# Altium PCB F407ZGT6.PcbDoc (part 2 of 7)
Units mil, origin at the board's own origin, x right, y up, seen from the top; angles counter-clockwise.
Board outline 4380 x 3940 mil, 2 copper layers (Top Layer, Bottom Layer); 88 components, 146 nets, 552 pads, 268 vias.
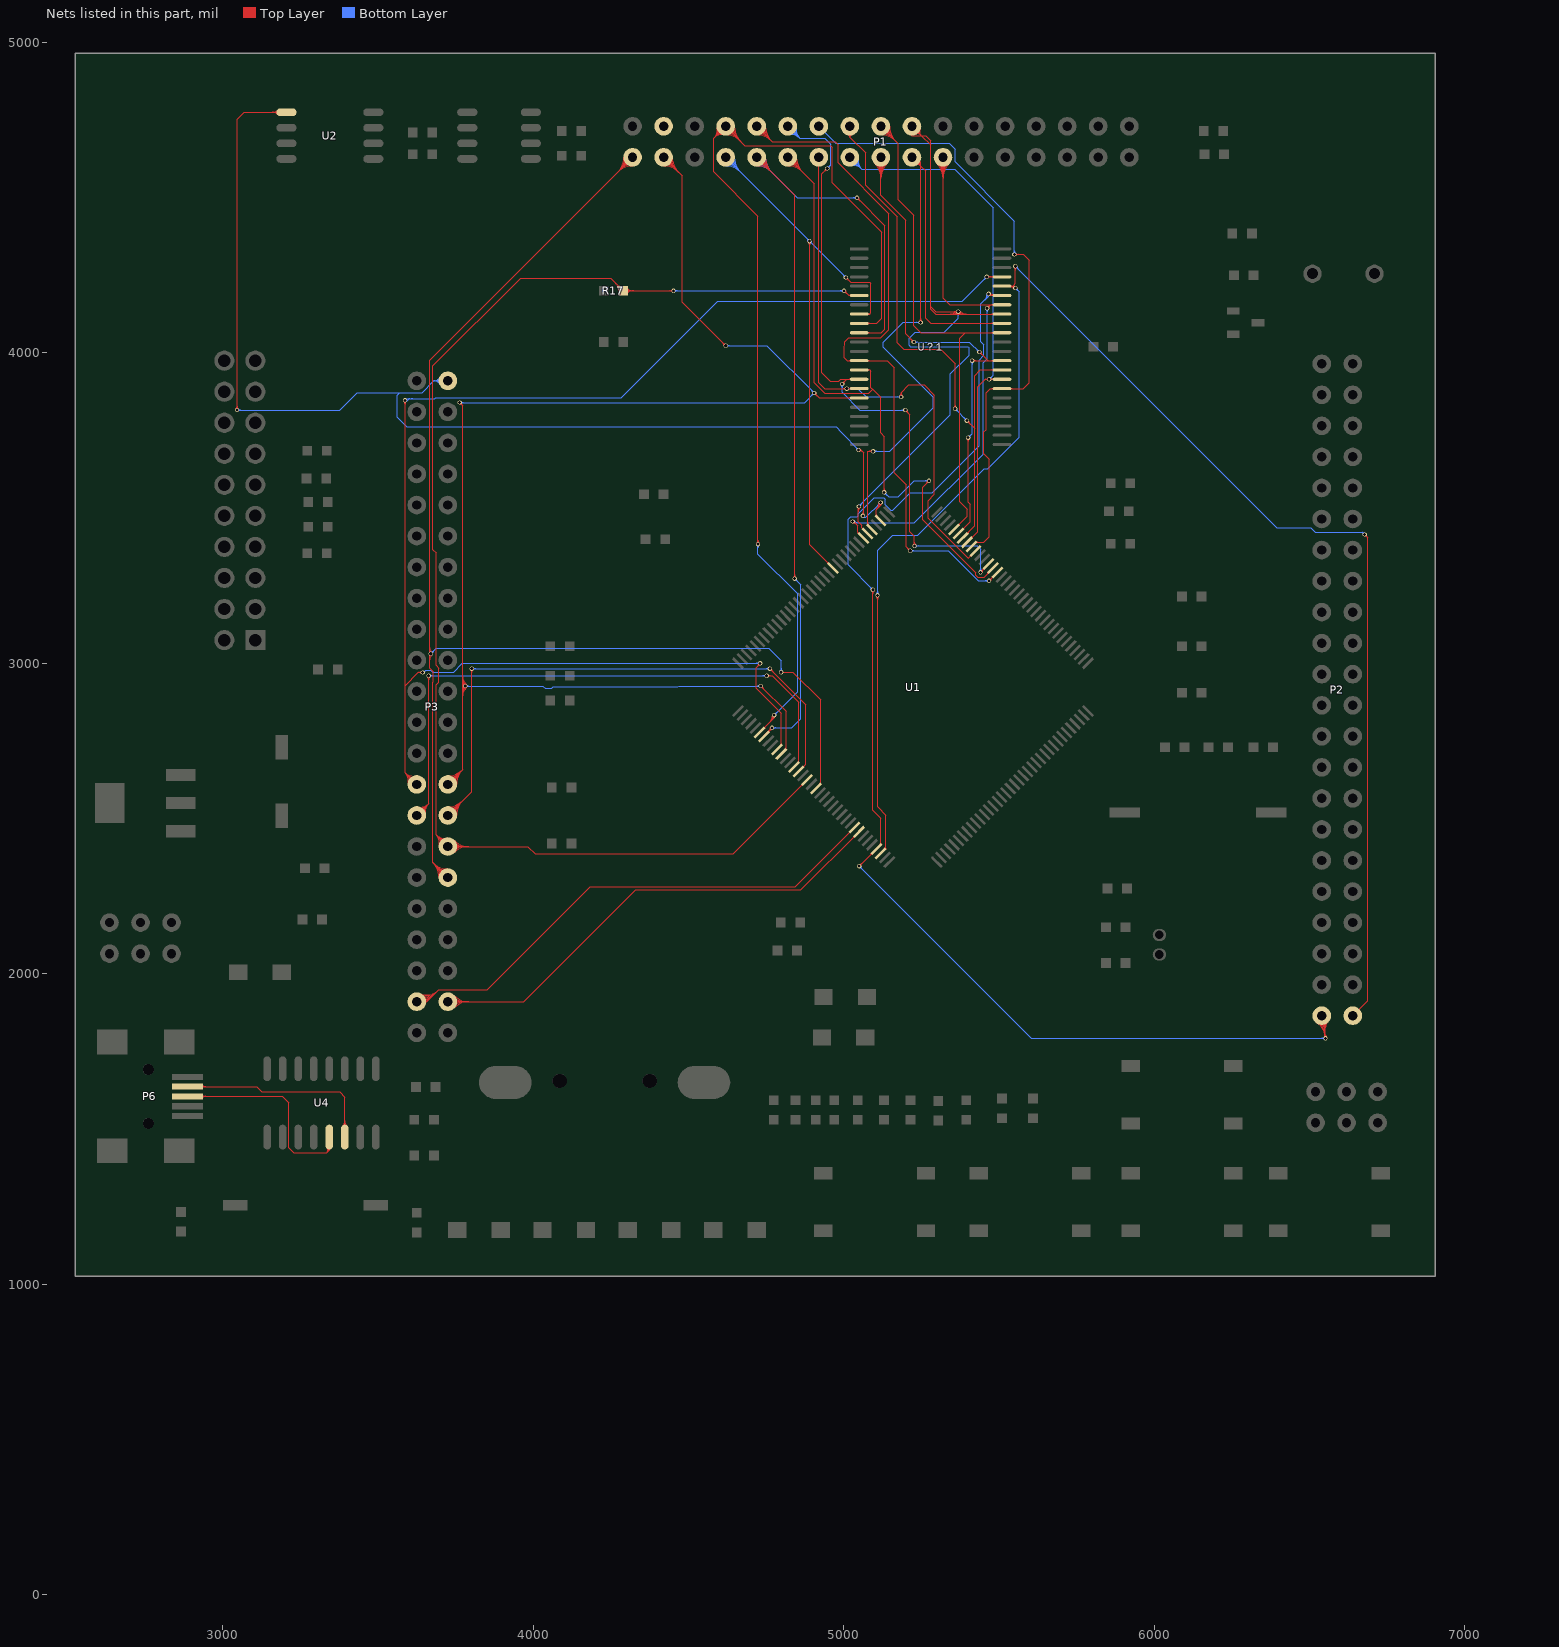
[diagram p2: the nets of this part, all layers, seen from the top]

## Via types
v1: diameter 14, hole 10, Top Layer to Bottom Layer, 265 vias
v2: diameter 150, hole 150, Top Layer to Bottom Layer, 3 vias

## Nets (pads, with @x,y where several pads share a name; then routed paths per layer and width w, separated by ;. In a path a pad name is that pad's centre, name@x,y a point inside that pad or via, vN(x,y) a via of type N, cw(c..) or ccw(c..) an arc to the next point about the centre after c; other vN are vias at no path point) (continued)
D1: P1.7 U1.86 U？1.8 | length 2304.5
  Top Layer w4: v1@4886.46,4356.46 cw(c4877.93,4347.93) 4890,4347.93 cw(c4902.07,4347.93) v1@4893.54,4356.46 ; v1(4890,4360) 4890,3382.45 U1.86@4965.93,3306.52 ; U1.86@4949.96,3320.16 ccw(c4944.34,3320.16) 4948.31,3324.14 ccw(c4952.29,3328.12) U1.86@4952.29,3322.49 ; v1@5007,4238 cw(c5007,4225.93) 5015.54,4234.46 cw(c5024.07,4243) v1@5012,4243 ; v1(5007,4243) 5022,4228 5084,4228 5088,4224 5088,4129 5084,4125 U？1.8@5050,4125 ; U？1.8@5077.12,4122.88 cw(c5082.24,4117.76) 5082.24,4125 cw(c5082.24,4132.24) U？1.8@5077.12,4127.12
  Bottom Layer w4: P1.7@4620,4602 cw(c4620,4534.4) 4667.8,4582.2 cw(c4715.6,4630) P1.7@4648,4630 ; P1.7@4620,4606 cw(c4620,4548.06) 4660.97,4589.03 cw(c4701.94,4630) P1.7@4644,4630 ; P1.7@4620,4610 cw(c4620,4561.72) 4654.14,4595.86 cw(c4688.28,4630) P1.7@4640,4630 ; P1.7@4620,4614 cw(c4620,4575.37) 4647.31,4602.69 cw(c4674.63,4630) P1.7@4636,4630 ; P1.7@4620,4630 v1(4890,4360) v1(5007,4243) ; v1@4885,4360 ccw(c4872.93,4360) 4881.46,4368.54 ccw(c4890,4377.07) v1@4890,4365 ; v1@4890,4355 cw(c4890,4342.93) 4898.54,4351.46 cw(c4907.07,4360) v1@4895,4360 ; v1@5002,4243 ccw(c4989.93,4243) 4998.46,4251.54 ccw(c5007,4260.07) v1@5007,4248
D2: P1.8 U1.114 U？1.9 | length 3902.5
  Top Layer w4: P1.8@4592.43,4725.12 cw(c4555.44,4718.57) 4582,4692 ; P1.8@4596.37,4725.81 cw(c4564.66,4720.2) 4587.43,4697.43 cw(c4610.2,4674.66) P1.8@4615.81,4706.37 ; P1.8@4600.31,4726.51 cw(c4573.88,4721.83) 4592.86,4702.86 cw(c4611.83,4683.88) P1.8@4616.51,4710.31 ; P1.8@4604.25,4727.21 cw(c4583.11,4723.47) 4598.29,4708.29 cw(c4613.47,4693.11) P1.8@4617.21,4714.25 ; P1.8@4615.12,4702.43 ccw(c4608.57,4665.44) 4582,4692 ; P1.8@4620,4702 cw(c4620,4634.4) 4667.8,4682.2 cw(c4715.6,4730) P1.8@4648,4730 ; P1.8@4620,4706 cw(c4620,4648.06) 4660.97,4689.03 cw(c4701.94,4730) P1.8@4644,4730 ; P1.8@4620,4710 cw(c4620,4661.72) 4654.14,4695.86 cw(c4688.28,4730) P1.8@4640,4730 ; P1.8@4620,4714 cw(c4620,4675.37) 4647.31,4702.69 cw(c4674.63,4730) P1.8@4636,4730 ; v1@4720.46,3387.54 ccw(c4711.93,3396.07) 4724,3396.07 ccw(c4736.07,3396.07) v1@4727.54,3387.54 ; v1(4724,3384) 4724,4441 4582,4583 4582,4692 ; U1.114@4729.3,2777.58 4776.07,2824.35 ; U1.114@4742.94,2793.55 ccw(c4742.94,2799.18) 4746.92,2795.2 ccw(c4750.9,2791.22) U1.114@4745.28,2791.22 ; 4761.37,2809.65 ccw(c4737.94,2833.07) v1@4771.07,2833.07 ; 4768.2,2816.48 ccw(c4751.6,2833.07) v1@4775.07,2833.07 ; v1@4773.55,2828.76 cw(c4770.97,2824.35) 4776.07,2824.35 ; 4775.03,2823.3 ccw(c4765.26,2833.07) v1@4779.07,2833.07 ; v1(4776.07,2833.07) 4776.07,2824.35 ; v1@4778.6,2828.76 ccw(c4781.18,2824.35) 4776.07,2824.35 ; U？1.9@5050,4095 5106,4095 5123,4112 5123,4389 4964,4548 4964,4662 4958,4668 4682,4668 P1.8@4620,4730 4582,4692 ; U？1.9@5077.12,4092.88 cw(c5082.24,4087.76) 5082.24,4095 cw(c5082.24,4102.24) U？1.9@5077.12,4097.12
  Bottom Layer w4: v1@4720.46,3380.46 cw(c4711.93,3371.93) 4724,3371.93 cw(c4736.07,3371.93) v1@4727.54,3380.46 ; v1(4724,3384) 4724,3351.58 4852,3223.58 4852,2909 v1(4776.07,2833.07) ; v1@4776.07,2838.07 ccw(c4776.07,2850.14) 4784.61,2841.61 ccw(c4793.14,2833.07) v1@4781.07,2833.07
D3: P1.9 U1.115 U？1.10 | length 3766.2
  Top Layer w4: P1.9@4720,4602 cw(c4720,4534.4) 4767.8,4582.2 cw(c4815.6,4630) P1.9@4748,4630 ; P1.9@4720,4606 cw(c4720,4548.06) 4760.97,4589.03 cw(c4801.94,4630) P1.9@4744,4630 ; P1.9@4720,4610 cw(c4720,4561.72) 4754.14,4595.86 cw(c4788.28,4630) P1.9@4740,4630 ; P1.9@4720,4614 cw(c4720,4575.37) 4747.31,4602.69 cw(c4774.63,4630) P1.9@4736,4630 ; P1.9@4720,4630 4842,4508 v1(4842,3273) ; U1.115@4743.22,2763.66 4743.22,2766.22 v1(4769,2792) ; U1.115@4758.93,2779.2 cw(c4773.14,2771) v1@4769.97,2787.09 ; U1.115@4759.2,2777.3 cw(c4771.01,2777.3) 4762.66,2785.66 ; 4761.99,2784.49 cw(c4766.75,2781.74) v1@4767.93,2787.12 ; 4763.33,2786.83 cw(c4770.88,2782.47) v1@4769.19,2791.02 ; v1@4764,2792 cw(c4751.93,2792) 4760.46,2783.46 cw(c4769,2774.93) v1@4769,2787 ; v1@4838.46,3276.54 ccw(c4829.93,3285.07) 4842,3285.07 ccw(c4854.07,3285.07) v1@4845.54,3276.54 ; v1@5043,4494.38 cw(c5043,4482.31) 5051.54,4490.85 cw(c5060.07,4499.38) v1@5048,4499.38 ; v1(5043,4499.38) 5133,4409.38 5133,4077 5121,4065 U？1.10@5050,4065 ; U？1.10@5077.12,4062.88 cw(c5082.24,4057.76) 5082.24,4065 cw(c5082.24,4072.24) U？1.10@5077.12,4067.12
  Bottom Layer w4: P1.9@4720,4602 cw(c4720,4534.4) 4767.8,4582.2 cw(c4815.6,4630) P1.9@4748,4630 ; P1.9@4720,4606 cw(c4720,4548.06) 4760.97,4589.03 cw(c4801.94,4630) P1.9@4744,4630 ; P1.9@4720,4610 cw(c4720,4561.72) 4754.14,4595.86 cw(c4788.28,4630) P1.9@4740,4630 ; P1.9@4720,4614 cw(c4720,4575.37) 4747.31,4602.69 cw(c4774.63,4630) P1.9@4736,4630 ; P1.9@4720,4630 4850.62,4499.38 v1(5043,4499.38) ; v1(4769,2792) 4832,2792 4862,2822 4862,3253 v1(4842,3273) ; v1@4772.54,2788.46 cw(c4781.07,2779.93) 4781.07,2792 cw(c4781.07,2804.07) v1@4772.54,2795.54 ; v1@4842,3268 cw(c4842,3255.93) 4850.54,3264.46 cw(c4859.07,3273) v1@4847,3273 ; v1@5039.46,4495.85 ccw(c5030.93,4487.31) 5030.93,4499.38 ccw(c5030.93,4511.45) v1@5039.46,4502.92
D4: P1.10 U1.58 U？1.13 | length 2718.7
  Top Layer w4: P1.10@4720,4702 cw(c4720,4634.4) 4767.8,4682.2 cw(c4815.6,4730) P1.10@4748,4730 ; P1.10@4720,4706 cw(c4720,4648.06) 4760.97,4689.03 cw(c4801.94,4730) P1.10@4744,4730 ; P1.10@4720,4710 cw(c4720,4661.72) 4754.14,4695.86 cw(c4788.28,4730) P1.10@4740,4730 ; P1.10@4720,4714 cw(c4720,4675.37) 4747.31,4702.69 cw(c4774.63,4730) P1.10@4736,4730 ; P1.10@4720,4730 4770,4680 4972.7,4680 4982,4670.7 4982,4612.47 5145.81,4448.66 5145.81,4074.9 5120,4049.08 5017.08,4049.08 5004,4036 5004,4024 5002,4022 5002,3984 5011,3975 U？1.13@5050,3975 5140,3975 5163,3952 5163,3614 5201,3576 5201,3376 v1(5214.46,3362.54) ; U？1.13@5022.88,3972.88 ccw(c5017.76,3967.76) 5017.76,3975 ccw(c5017.76,3982.24) U？1.13@5022.88,3977.12 ; U？1.13@5077.12,3972.88 cw(c5082.24,3967.76) 5082.24,3975 cw(c5082.24,3982.24) U？1.13@5077.12,3977.12 ; v1@5209.46,3362.54 ccw(c5197.39,3362.54) 5205.93,3371.07 ccw(c5214.46,3379.61) v1@5214.46,3367.54 ; v1(5468.14,3265.86) U1.58@5494.87,3292.6 ; v1@5468.14,3270.86 ccw(c5468.14,3282.94) 5476.67,3274.4 ccw(c5485.21,3265.86) v1@5473.14,3265.86 ; U1.58@5478.9,3278.96 cw(c5473.27,3278.96) 5477.25,3274.98 cw(c5481.23,3271) U1.58@5481.23,3276.63
  Bottom Layer w4: v1(5214.46,3362.54) 5337.5,3362.54 5434.17,3265.86 v1(5468.14,3265.86) ; v1@5218,3359 cw(c5226.53,3350.47) 5226.53,3362.54 cw(c5226.53,3374.61) v1@5218,3366.07 ; v1@5464.6,3262.33 ccw(c5456.06,3253.79) 5456.06,3265.86 ccw(c5456.06,3277.94) v1@5464.6,3269.4
D5: P1.11 U1.59 U？1.14 | length 2474.6
  Top Layer w4: P1.11@4820,4602 cw(c4820,4534.4) 4867.8,4582.2 cw(c4915.6,4630) P1.11@4848,4630 ; P1.11@4820,4606 cw(c4820,4548.06) 4860.97,4589.03 cw(c4901.94,4630) P1.11@4844,4630 ; P1.11@4820,4610 cw(c4820,4561.72) 4854.14,4595.86 cw(c4888.28,4630) P1.11@4840,4630 ; P1.11@4820,4614 cw(c4820,4575.37) 4847.31,4602.69 cw(c4874.63,4630) P1.11@4836,4630 ; P1.11@4820,4630 4905,4545 4905,3904 4939,3870 5080,3870 5093,3883 ; U？1.14@5050,3945 5084,3945 5088,3941 5088,3888 5093,3883 ; U？1.14@5077.12,3942.88 cw(c5082.24,3937.76) 5082.24,3945 cw(c5082.24,3952.24) U？1.14@5077.12,3947.12 ; v1@5126.96,3554.15 ccw(c5118.43,3562.68) 5130.5,3562.68 ccw(c5142.57,3562.68) v1@5134.04,3554.15 ; v1(5130.5,3550.61) 5130.5,3730.61 5119,3742.11 5119,3857 5093,3883 ; v1@5270,3588 cw(c5257.93,3588) 5266.46,3579.46 cw(c5275,3570.93) v1@5275,3583 ; v1@5279,3588 v1(5275,3588) 5255,3568 5255,3463 5426,3292 5426,3284 5432,3278 5452.43,3278 U1.59@5480.95,3306.52 ; U1.59@5464.98,3292.88 cw(c5459.35,3292.88) 5463.33,3288.9 cw(c5467.31,3284.92) U1.59@5467.31,3290.55
  Bottom Layer w4: v1@5130.5,3545.61 cw(c5130.5,3533.54) 5139.04,3542.07 cw(c5147.57,3550.61) v1@5135.5,3550.61 ; v1(5130.5,3550.61) 5145.11,3536 5175.11,3536 5227.11,3588 v1(5275,3588) ; v1@5271.46,3584.46 ccw(c5262.93,3575.93) 5262.93,3588 ccw(c5262.93,3600.07) v1@5271.46,3591.54
D6: P1.12 U1.60 U？1.15 | length 2547.1
  Top Layer w4: v1@4942,4594 cw(c4929.93,4594) 4938.46,4585.46 cw(c4947,4576.93) v1@4947,4589 ; v1(4947,4594) 4930,4577 4930,3936 4957,3909 4984,3909 4990,3915 5010,3915 ; v1(4995,3900) 5010,3915 ; v1@4995,3905 ccw(c4995,3917.07) 5003.54,3908.54 ccw(c5012.07,3900) v1@5000,3900 ; U？1.15@5022.88,3912.88 ccw(c5017.76,3907.76) 5017.76,3915 ccw(c5017.76,3922.24) U？1.15@5022.88,3917.12 ; U？1.15@5050,3915 5010,3915 ; v1@5198.56,3811 cw(c5198.56,3798.93) 5207.09,3807.46 cw(c5215.63,3816) v1@5203.56,3816 ; v1(5198.56,3816) 5213,3801.56 5213,3423.88 5228,3408.88 v1(5228,3378) ; v1@5224.46,3381.54 ccw(c5215.93,3390.07) 5228,3390.07 ccw(c5240.07,3390.07) v1@5231.54,3381.54 ; v1(5441,3293) 5441,3294.41 U1.60@5467.03,3320.44 ; v1@5441,3298 ccw(c5441,3306.68) 5447.14,3300.54 ; v1@5446,3293 cw(c5461.47,3293) U1.60@5450.53,3303.94 ; U1.60@5451.06,3306.8 cw(c5445.43,3306.8) 5449.41,3302.82 cw(c5453.39,3298.84) U1.60@5453.39,3304.47
  Bottom Layer w4: P1.12@4820,4730 4859,4691 ; P1.12@4822.46,4714.19 cw(c4825.99,4691.43) 4842.28,4707.72 cw(c4858.57,4724.01) P1.12@4835.81,4727.54 ; P1.12@4823.07,4710.24 cw(c4827.49,4681.78) 4847.86,4702.14 cw(c4868.22,4722.51) P1.12@4839.76,4726.93 ; P1.12@4823.69,4706.28 cw(c4828.99,4672.14) 4853.43,4696.57 cw(c4877.86,4721.01) P1.12@4843.72,4726.31 ; P1.12@4824.3,4702.33 cw(c4830.49,4662.49) 4859,4691 ; P1.12@4847.67,4725.7 ccw(c4887.51,4719.51) 4859,4691 ; v1(4947,4594) 4958,4605 4958,4672 4939,4691 4859,4691 ; v1@4947,4599 ccw(c4947,4611.07) 4955.54,4602.54 ccw(c4964.07,4594) v1@4952,4594 ; v1@4991.46,3896.46 cw(c4982.93,3887.93) 4995,3887.93 cw(c5007.07,3887.93) v1@4998.54,3896.46 ; v1(4995,3900) 4995,3873.15 5052.15,3816 v1(5198.56,3816) ; v1@5195.02,3812.46 ccw(c5186.49,3803.93) 5186.49,3816 ccw(c5186.49,3828.07) v1@5195.02,3819.54 ; v1(5228,3378) 5431,3378 5441,3368 v1(5441,3293) ; v1@5231.54,3374.46 cw(c5240.07,3365.93) 5240.07,3378 cw(c5240.07,3390.07) v1@5231.54,3381.54 ; v1@5437.46,3296.54 ccw(c5428.93,3305.07) 5441,3305.07 ccw(c5453.07,3305.07) v1@5444.54,3296.54
D7: P1.13 U1.63 U？1.16 | length 1931.1
  Top Layer w4: P1.13@4920,4630 4920,3904 4939,3885 v1(5010,3885) U？1.16@5050,3885 ; v1@5006.46,3881.46 ccw(c4997.93,3872.93) 4997.93,3885 ccw(c4997.93,3897.07) v1@5006.46,3888.54 ; v1@5013.54,3881.46 cw(c5022.07,3872.93) 5022.07,3885 cw(c5022.07,3897.07) v1@5013.54,3888.54 ; U？1.16@5022.88,3882.88 ccw(c5017.76,3877.76) 5017.76,3885 ccw(c5017.76,3892.24) U？1.16@5022.88,3887.12 ; v1@5181.46,3861.54 ccw(c5172.93,3870.07) 5185,3870.07 ccw(c5197.07,3870.07) v1@5188.54,3861.54 ; v1(5185,3858) 5185,3872 5210,3897 5259,3897 5292,3864 5292,3544 5272,3524 5272,3468 5401.54,3338.46 U1.63@5425.27,3362.2 ; U1.63@5409.3,3348.55 cw(c5403.68,3348.55) 5407.65,3344.58 cw(c5411.63,3340.6) U1.63@5411.63,3346.22
  Bottom Layer w4: v1(5010,3885) 5045,3885 5072,3858 v1(5185,3858) ; v1@5013.54,3881.46 cw(c5022.07,3872.93) 5022.07,3885 cw(c5022.07,3897.07) v1@5013.54,3888.54 ; v1@5181.46,3854.46 ccw(c5172.93,3845.93) 5172.93,3858 ccw(c5172.93,3870.07) v1@5181.46,3861.54
D8: P1.14 U1.64 U？1.29 | length 2103
  Top Layer w4: U1.64@5411.36,3376.12 5425.24,3390 5451.17,3390 5469.17,3408 5469.17,3657.83 5452,3675 5452,3746 5459,3753 5459,3872 5472,3885 U？1.29@5510,3885 5578,3885 5597,3904 5597,4299 5579,4317 v1(5550,4317) ; U1.64@5426.65,3388.11 cw(c5431.21,3383.54) 5431.21,3390 ; U1.64@5426.65,3391.41 ccw(c5430.04,3394.8) U1.64@5430.04,3390 ; U？1.29@5482.88,3882.88 ccw(c5477.76,3877.76) 5477.76,3885 ccw(c5477.76,3892.24) U？1.29@5482.88,3887.12 ; U？1.29@5537.12,3882.88 cw(c5542.24,3877.76) 5542.24,3885 cw(c5542.24,3892.24) U？1.29@5537.12,3887.12 ; v1@5553.54,4313.46 cw(c5562.07,4304.93) 5562.07,4317 cw(c5562.07,4329.07) v1@5553.54,4320.54
  Bottom Layer w4: P1.14@4920,4730 4975,4675 5340,4675 5359,4656 5359,4615 5550,4424 v1(5550,4317) ; v1@5546.46,4320.54 ccw(c5537.93,4329.07) 5550,4329.07 ccw(c5562.07,4329.07) v1@5553.54,4320.54
D9: P1.15 U1.65 U？1.30 | length 1994.9
  Top Layer w4: U1.65@5397.44,3390.04 5432,3424.6 5432,3891 5456,3915 v1(5468.42,3915) U？1.30@5510,3915 ; U1.65@5411.08,3406.01 ccw(c5411.08,3411.63) 5415.06,3407.66 ccw(c5419.03,3403.68) U1.65@5413.41,3403.68 ; v1@5464.88,3911.46 ccw(c5456.34,3902.93) 5456.34,3915 ccw(c5456.34,3927.07) v1@5464.88,3918.54 ; v1@5471.95,3911.46 cw(c5480.49,3902.93) 5480.49,3915 cw(c5480.49,3927.07) v1@5471.95,3918.54 ; U？1.30@5482.88,3912.88 ccw(c5477.76,3907.76) 5477.76,3915 ccw(c5477.76,3922.24) U？1.30@5482.88,3917.12
  Bottom Layer w4: P1.15@5020,4630 5058,4592 ; P1.15@5022.79,4614.25 cw(c5026.53,4593.11) 5041.71,4608.29 cw(c5056.89,4623.47) P1.15@5035.75,4627.21 ; P1.15@5023.49,4610.31 cw(c5028.17,4583.88) 5047.14,4602.86 cw(c5066.12,4621.83) P1.15@5039.69,4626.51 ; P1.15@5024.19,4606.37 cw(c5029.8,4574.66) 5052.57,4597.43 cw(c5075.34,4620.2) P1.15@5043.63,4625.81 ; P1.15@5024.88,4602.43 cw(c5031.43,4565.44) 5058,4592 ; P1.15@5047.57,4625.12 ccw(c5084.56,4618.57) 5058,4592 ; v1(5468.42,3915) 5482,3928.58 5482,4468 5358,4592 5058,4592 ; v1@5468.42,3920 ccw(c5468.42,3932.07) 5476.95,3923.54 ccw(c5485.49,3915) v1@5473.42,3915
D10: P1.16 U1.66 U？1.31 | length 1961
  Top Layer w4: P1.16@5013.85,4702.68 cw(c5012.13,4695) 5020,4695 ; P1.16@5020,4730 5020,4695 ; P1.16@5026.15,4702.68 ccw(c5027.87,4695) 5020,4695 ; v1@5355.46,3823.54 ccw(c5346.93,3832.07) 5359,3832.07 ccw(c5371.07,3832.07) v1@5362.54,3823.54 ; v1(5359,3820) 5359,3965 5312,4012 5193,4012 5173,4032 5173,4438 5071,4540 5071,4644 5020,4695 ; U1.66@5383.52,3403.96 5422,3442.44 5422,3757 ; v1@5397,3777 cw(c5397,3764.93) 5405.54,3773.46 cw(c5414.07,3782) v1@5402,3782 ; v1(5397,3782) 5422,3757 ; U1.66@5397.16,3419.93 ccw(c5397.16,3425.55) 5401.14,3421.58 ccw(c5405.11,3417.6) U1.66@5399.49,3417.6 ; U？1.31@5482.88,3942.88 ccw(c5477.76,3937.76) 5477.76,3945 ccw(c5477.76,3952.24) U？1.31@5482.88,3947.12 ; U？1.31@5510,3945 5440,3945 5422,3927 5422,3757
  Bottom Layer w4: v1@5359,3815 cw(c5359,3802.93) 5367.54,3811.46 cw(c5376.07,3820) v1@5364,3820 ; v1(5359,3820) v1(5397,3782) ; v1@5392,3782 ccw(c5379.93,3782) 5388.46,3790.54 ccw(c5397,3799.07) v1@5397,3787
D11: P1.17 U1.67 U？1.32 | length 2085.9
  Top Layer w4: P1.17@5100.2,4610.2 cw(c5052.4,4562.4) 5120,4562.4 cw(c5187.6,4562.4) P1.17@5139.8,4610.2 ; P1.17@5103.03,4613.03 cw(c5062.06,4572.06) 5120,4572.06 cw(c5177.94,4572.06) P1.17@5136.97,4613.03 ; P1.17@5105.86,4615.86 cw(c5071.72,4581.72) 5120,4581.72 cw(c5168.28,4581.72) P1.17@5134.14,4615.86 ; P1.17@5108.69,4618.69 cw(c5081.37,4591.37) 5120,4591.37 cw(c5158.63,4591.37) P1.17@5131.31,4618.69 ; P1.17@5120,4630 5120,4507.74 5200,4427.74 5200,4061 v1(5226,4035) ; v1@5221,4035 ccw(c5208.93,4035) 5217.46,4043.54 ccw(c5226,4052.07) v1@5226,4040 ; U1.67@5369.6,3417.87 5408.19,3456.47 5408.19,3512.19 5401,3519.39 v1(5401,3727) ; U1.67@5383.24,3433.85 ccw(c5383.24,3439.47) 5387.22,3435.49 ccw(c5391.2,3431.51) U1.67@5385.57,3431.51 ; v1@5397.46,3723.46 cw(c5388.93,3714.93) 5401,3714.93 cw(c5413.07,3714.93) v1@5404.54,3723.46 ; v1(5414,3975) 5465,3975 ; v1@5417.54,3971.46 cw(c5426.07,3962.93) 5426.07,3975 cw(c5426.07,3987.07) v1@5417.54,3978.54 ; v1@5437,3998 cw(c5437,3985.93) 5445.54,3994.46 cw(c5454.07,4003) v1@5442,4003 ; v1(5437,4003) 5465,3975 ; U？1.32@5482.88,3972.88 ccw(c5477.76,3967.76) 5477.76,3975 ccw(c5477.76,3982.24) U？1.32@5482.88,3977.12 ; U？1.32@5510,3975 5465,3975
  Bottom Layer w4: v1(5226,4035) 5405,4035 v1(5437,4003) ; v1@5229.54,4031.46 cw(c5238.07,4022.93) 5238.07,4035 cw(c5238.07,4047.07) v1@5229.54,4038.54 ; v1(5401,3727) 5414,3740 v1(5414,3975) ; v1@5401,3732 ccw(c5401,3744.07) 5409.54,3735.54 ccw(c5418.07,3727) v1@5406,3727 ; v1@5410.46,3971.46 cw(c5401.93,3962.93) 5414,3962.93 cw(c5426.07,3962.93) v1@5417.54,3971.46 ; v1@5432,4003 ccw(c5419.93,4003) 5428.46,4011.54 ccw(c5437,4020.07) v1@5437,4008
D12: P1.18 U1.68 U？1.35 | length 2001.8
  Top Layer w4: P1.18@5120,4702 cw(c5120,4634.4) 5167.8,4682.2 cw(c5215.6,4730) P1.18@5148,4730 ; P1.18@5120,4706 cw(c5120,4648.06) 5160.97,4689.03 cw(c5201.94,4730) P1.18@5144,4730 ; P1.18@5120,4710 cw(c5120,4661.72) 5154.14,4695.86 cw(c5188.28,4730) P1.18@5140,4730 ; P1.18@5120,4714 cw(c5120,4675.37) 5147.31,4702.69 cw(c5174.63,4730) P1.18@5136,4730 ; P1.18@5120,4730 5176,4674 5176,4493.01 5226,4443.01 5226,4087 5248,4065 5391,4065 ; U1.68@5355.68,3431.79 5398.19,3474.31 5398.19,3496 5374,3520.19 5374,4048 5391,4065 ; U1.68@5369.32,3447.77 ccw(c5369.32,3453.39) 5373.3,3449.41 ccw(c5377.28,3445.43) U1.68@5371.65,3445.43 ; U？1.35@5482.88,4062.88 ccw(c5477.76,4057.76) 5477.76,4065 ccw(c5477.76,4072.24) U？1.35@5482.88,4067.12 ; U？1.35@5510,4065 5391,4065
D13: P1.19 U1.77 U？1.36 | length 2457.7
  Top Layer w4: 5077,3452.43 ccw(c5084.56,3452.43) U1.77@5079.22,3447.08 ; U1.77@5091.21,3431.79 5077,3446 5077,3683 v1(5095,3683) ; v1@5091.46,3679.46 ccw(c5082.93,3670.93) 5082.93,3683 ccw(c5082.93,3695.07) v1@5091.46,3686.54 ; P1.19@5230.34,4608.34 cw(c5235.52,4597.52) 5244,4606 cw(c5252.48,4614.48) P1.19@5241.66,4619.66 ; P1.19@5232.07,4604.73 cw(c5238.1,4592.1) 5248,4602 ; v1@5244.46,4101.54 ccw(c5235.93,4110.07) 5248,4110.07 ccw(c5260.07,4110.07) v1@5251.54,4101.54 ; P1.19@5245.27,4617.93 ccw(c5257.9,4611.9) 5248,4602 ; v1(5248,4098) 5248,4602 ; U？1.36@5482.88,4092.88 ccw(c5477.76,4087.76) 5477.76,4095 ccw(c5477.76,4102.24) U？1.36@5482.88,4097.12 ; U？1.36@5510,4095 5280,4095 5264,4111 5264,4586 5248,4602 ; P1.19@5234,4616 5220,4616 P1.19@5220,4630 P1.19@5234,4616 ; P1.19@5234,4616 5248,4616 5248,4602 ; P1.19@5234,4616 5248,4602
  Bottom Layer w4: v1(5095,3683) 5148,3683 5289,3824 5289,3857 5128,4018 5128,4034 5192,4098 v1(5248,4098) ; v1@5098.54,3679.46 cw(c5107.07,3670.93) 5107.07,3683 cw(c5107.07,3695.07) v1@5098.54,3686.54 ; v1@5244.46,4094.46 ccw(c5235.93,4085.93) 5235.93,4098 ccw(c5235.93,4110.07) v1@5244.46,4101.54
D14: P1.20 U1.78 U？1.37 | length 2609.7
  Top Layer w4: v1@5045.46,3501.78 cw(c5041.76,3498.08) 5047,3498.08 cw(c5056.24,3498.08) v1@5049.71,3504.61 ; 5047,3488.42 cw(c5065.9,3488.42) v1@5052.54,3501.78 ; v1(5049,3505.32) 5047,3503.32 5047,3456.14 5058,3445.14 5058,3437.36 5077.29,3418.07 U1.78@5077.29,3417.87 ; 5059.53,3435.82 cw(c5055.23,3431.51) U1.78@5061.32,3431.51 ; 5060,3435.36 ccw(c5063.65,3439.01) U1.78@5063.65,3433.85 ; P1.20@5227.44,4711.44 cw(c5232.27,4699.41) 5241.43,4708.57 cw(c5250.59,4717.73) P1.20@5238.56,4722.56 ; P1.20@5228.93,4707.72 cw(c5234.72,4693.29) 5245.71,4704.29 cw(c5256.71,4715.28) P1.20@5242.28,4721.07 ; P1.20@5230.42,4704.01 cw(c5237.17,4687.17) 5250,4700 ; P1.20@5245.99,4719.58 ccw(c5262.83,4712.83) 5250,4700 ; 5337.62,4125 ccw(c5337.62,4164.38) 5365.46,4136.54 cw(c5356.93,4145.07) 5356.93,4133 cw(c5356.93,4120.93) v1@5365.46,4129.46 ; 5347.27,4125 ccw(c5347.27,4154.73) v1@5368.29,4133.71 ; 5356.93,4125 ccw(c5356.93,4145.07) v1@5371.12,4130.88 ; 5364.05,4128.05 ccw(c5371.41,4135.41) 5371.41,4125 ; 5366.59,4125 ccw(c5366.59,4135.41) 5373.95,4128.05 ; v1@5366.88,4130.88 ccw(c5381.07,4145.07) 5381.07,4125 ; v1(5369,4133) 5296,4133 5280,4149 ; v1@5369.71,4133.71 ccw(c5390.73,4154.73) 5390.73,4125 ; v1@5372.54,4136.54 ccw(c5400.38,4164.38) 5400.38,4125 ; U？1.37@5482.88,4122.88 ccw(c5477.76,4117.76) 5477.76,4125 ccw(c5477.76,4132.24) U？1.37@5482.88,4127.12 ; U？1.37@5510,4125 5296,4125 5280,4141 5280,4149 ; 5250,4700 5220,4700 P1.20@5220,4730 5250,4700 ; 5250,4700 5264,4700 5280,4684 5280,4670 ; 5250,4700 5280,4670 ; 5280,4149 5280,4670
  Bottom Layer w4: v1(5049,3505.32) 5344,3800.32 5344,3933 5404,3993 5404,4016 5400,4020 5215,4020 5211,4024 5211,4048 5230,4067 5324,4067 5369,4112 v1(5369,4133) ; v1@5049,3510.32 ccw(c5049,3522.39) 5057.54,3513.86 ccw(c5066.07,3505.32) v1@5054,3505.32 ; v1@5365.46,4129.46 cw(c5356.93,4120.93) 5369,4120.93 cw(c5381.07,4120.93) v1@5372.54,4129.46
D15: P1.21 U1.79 U？1.38 | length 2179.4
  Top Layer w4: v1@5029,3452 cw(c5029,3432.69) 5042.66,3446.34 ; v1@5029,3456 cw(c5029,3446.34) 5035.83,3453.17 ; v1(5029,3457) 5032,3457 5045,3444 5045,3422.33 U1.79@5063.37,3403.96 ; v1@5034,3457 ccw(c5038.83,3457) 5035.41,3453.59 ; U1.79@5047.4,3417.6 ccw(c5041.77,3417.6) 5045.75,3421.58 ccw(c5049.73,3425.55) U1.79@5049.73,3419.93 ; P1.21@5300.2,4610.2 cw(c5252.4,4562.4) 5320,4562.4 cw(c5387.6,4562.4) P1.21@5339.8,4610.2 ; P1.21@5303.03,4613.03 cw(c5262.06,4572.06) 5320,4572.06 cw(c5377.94,4572.06) P1.21@5336.97,4613.03 ; P1.21@5305.86,4615.86 cw(c5271.72,4581.72) 5320,4581.72 cw(c5368.28,4581.72) P1.21@5334.14,4615.86 ; P1.21@5308.69,4618.69 cw(c5281.37,4591.37) 5320,4591.37 cw(c5358.63,4591.37) P1.21@5331.31,4618.69 ; P1.21@5320,4630 5320,4176 5341,4155 5473,4155 ; v1(5462,4144) 5473,4155 ; v1@5462,4149 ccw(c5462,4161.07) 5470.54,4152.54 ccw(c5479.07,4144) v1@5467,4144 ; U？1.38@5482.88,4152.88 ccw(c5477.76,4147.76) 5477.76,4155 ccw(c5477.76,4162.24) U？1.38@5482.88,4157.12 ; U？1.38@5510,4155 5473,4155
  Bottom Layer w4: v1(5029,3457) 5033.37,3452.63 5227.63,3452.63 5449,3674 5449,3968 5462,3981 v1(5462,4144) ; v1@5029.71,3457.71 ccw(c5041.96,3469.96) 5041.96,3452.63 ; v1@5032.54,3460.54 ccw(c5051.62,3479.62) 5051.62,3452.63 ; v1@5458.46,4140.46 cw(c5449.93,4131.93) 5462,4131.93 cw(c5474.07,4131.93) v1@5465.54,4140.46
D+: P6.3 U4.5 | length 769.3
  Top Layer w4: P6.3@2885.98,1605 3192,1605 3213,1584 3213,1440 3229,1424 3335,1424 ; P6.3@2931.64,1599.34 cw(c2945.3,1585.69) 2945.3,1605 cw(c2945.3,1624.31) P6.3@2931.64,1610.66 ; U4.5@3335.49,1439.39 cw(c3327.04,1431.96) 3335,1424 ; 3338.02,1427.02 ccw(c3330.25,1434.78) U4.5@3338.5,1442.04 ; U4.5@3339.76,1436.54 cw(c3338.2,1432) 3343,1432 ; 3341.03,1430.03 ccw(c3333.46,1437.6) U4.5@3341.5,1444.68 ; U4.5@3343,1474 3343,1432 ; 3344.05,1433.05 ccw(c3336.66,1440.43) U4.5@3344.5,1447.32 ; U4.5@3346.24,1436.54 ccw(c3347.8,1432) 3343,1432 ; 3335,1424 3343,1432
D-: P6.2 U4.6 | length 740.9
  Top Layer w4: P6.2@2885.98,1636.5 3109.5,1636.5 3126,1620 3376,1620 3393,1603 U4.6@3393,1474 ; P6.2@2931.64,1630.84 cw(c2945.3,1617.18) 2945.3,1636.5 cw(c2945.3,1655.81) P6.2@2931.64,1642.15 ; U4.6@3385.93,1509.07 ccw(c3368.86,1526.14) 3393,1526.14 ccw(c3417.14,1526.14) U4.6@3400.07,1509.07 ; U4.6@3388.76,1506.24 ccw(c3378.51,1516.49) 3393,1516.49 ccw(c3407.49,1516.49) U4.6@3397.24,1506.24
DCMI_D5: P3.4 U1.136 | length 2172.7
  Top Layer w4: P3.4@3621.99,1902.59 ccw(c3634.01,1932.2) 3656.6,1909.6 ; P3.4@3623.5,1906.29 ccw(c3636.47,1938.27) 3660.87,1913.87 ; P3.4@3626.5,1913.71 ccw(c3641.4,1950.41) 3669.4,1922.4 ; P3.4@3628.01,1917.41 ccw(c3643.86,1956.47) 3673.67,1926.67 ; P3.4@3629.51,1921.12 ccw(c3646.32,1962.54) 3677.93,1930.93 ; P3.4@3631.02,1924.83 ccw(c3648.78,1968.61) 3682.2,1935.2 ; P3.4@3632.52,1928.53 ccw(c3651.25,1974.68) 3686.47,1939.47 ; P3.4@3634.02,1932.24 ccw(c3653.71,1980.75) 3690.73,1943.73 ; P3.4@3635.53,1935.95 ccw(c3656.17,1986.82) 3695,1948 ; P3.4@3652.75,1906.28 cw(c3657,1905.71) 3657,1910 ; P3.4@3652.75,1913.72 ccw(c3657,1914.29) 3657,1910 ; 3665.13,1918.13 cw(c3638.93,1944.34) P3.4@3625,1910 3657,1910 ; U1.136@5019.56,2457.72 cw(c5013.93,2457.72) 5017.91,2453.74 cw(c5021.89,2449.76) U1.136@5021.89,2455.38 ; U1.136@5035.53,2471.36 4844.18,2280 4183.9,2280 3851.9,1948 3695,1948 ; 3657,1910 3695,1948
DCMI_SCL: P3.16 U1.122 | length 2220.2
  Top Layer w4: P3.16@3625,2510 3663,2548 ; P3.16@3627.79,2525.75 ccw(c3631.53,2546.89) 3646.71,2531.71 ccw(c3661.89,2516.53) P3.16@3640.75,2512.79 ; P3.16@3628.49,2529.69 ccw(c3633.17,2556.12) 3652.14,2537.14 ccw(c3671.12,2518.17) P3.16@3644.69,2513.49 ; P3.16@3629.19,2533.63 ccw(c3634.8,2565.34) 3657.57,2542.57 ccw(c3680.34,2519.8) P3.16@3648.63,2514.19 ; P3.16@3629.88,2537.57 ccw(c3636.43,2574.56) 3663,2548 ; P3.16@3652.57,2514.88 cw(c3689.56,2521.43) 3663,2548 ; v1@3659.46,2956.42 cw(c3650.93,2947.89) 3663,2947.89 cw(c3675.07,2947.89) v1@3666.54,2956.42 ; v1(3663,2959.96) 3663,2548 ; v1(4752.04,2959.96) 4770.15,2959.96 4856,2874.11 4856,2683 4840.66,2667.66 U1.122@4840.66,2666.23 ; v1@4755.58,2956.42 cw(c4764.11,2947.89) 4764.11,2959.96 cw(c4764.11,2972.03) v1@4755.58,2963.49 ; U1.122@4852.65,2681.52 ccw(c4844.57,2689.6) 4856,2689.6
  Bottom Layer w4: v1(3663,2959.96) v1(4752.04,2959.96) ; v1@3666.54,2956.42 cw(c3675.07,2947.89) 3675.07,2959.96 cw(c3675.07,2972.03) v1@3666.54,2963.49 ; v1@4748.51,2956.42 ccw(c4739.97,2947.89) 4739.97,2959.96 ccw(c4739.97,2972.03) v1@4748.51,2963.49
DCMI_SDA: P3.15 U1.123 | length 2272.3
  Top Layer w4: P3.15@3725,2510 3802,2587 v1(3802,2983) ; P3.15@3725,2526 ccw(c3725,2564.63) 3752.31,2537.31 ccw(c3779.63,2510) P3.15@3741,2510 ; P3.15@3725,2530 ccw(c3725,2578.28) 3759.14,2544.14 ccw(c3793.28,2510) P3.15@3745,2510 ; P3.15@3725,2534 ccw(c3725,2591.94) 3765.97,2550.97 ccw(c3806.94,2510) P3.15@3749,2510 ; P3.15@3725,2538 ccw(c3725,2605.6) 3772.8,2557.8 ccw(c3820.6,2510) P3.15@3753,2510 ; v1@3798.46,2979.46 cw(c3789.93,2970.93) 3802,2970.93 cw(c3814.07,2970.93) v1@3805.54,2979.46 ; v1@4762.23,2978 cw(c4762.23,2965.93) 4770.77,2974.46 cw(c4779.3,2983) v1@4767.23,2983 ; v1(4762.23,2983) 4878,2867.23 4878,2675 4855.31,2652.31 U1.123@4854.58,2652.31 ; U1.123@4868.22,2668.28 ccw(c4868.22,2675.66) 4873.44,2670.44 ; U1.123@4870.55,2665.95 cw(c4874.42,2665.95) 4871.68,2668.69
  Bottom Layer w4: v1(3802,2983) v1(4762.23,2983) ; v1@3805.54,2979.46 cw(c3814.07,2970.93) 3814.07,2983 cw(c3814.07,2995.07) v1@3805.54,2986.54 ; v1@4758.69,2979.46 ccw(c4750.16,2970.93) 4750.16,2983 ccw(c4750.16,2995.07) v1@4758.69,2986.54
DCMI_VSYNC: P3.3 U1.137 | length 1893.8
  Top Layer w4: P3.3@3725,1910 3970,1910 4330,2270 4862.01,2270 U1.137@5049.45,2457.44 ; P3.3@3736.31,1898.69 cw(c3763.63,1871.37) 3763.63,1910 cw(c3763.63,1948.63) P3.3@3736.31,1921.31 ; P3.3@3739.14,1895.86 cw(c3773.28,1861.72) 3773.28,1910 cw(c3773.28,1958.28) P3.3@3739.14,1924.14 ; P3.3@3741.97,1893.03 cw(c3782.94,1852.06) 3782.94,1910 cw(c3782.94,1967.94) P3.3@3741.97,1926.97 ; P3.3@3744.8,1890.2 cw(c3792.6,1842.4) 3792.6,1910 cw(c3792.6,1977.6) P3.3@3744.8,1929.8 ; U1.137@5033.48,2443.8 cw(c5027.85,2443.8) 5031.83,2439.82 cw(c5035.81,2435.84) U1.137@5035.81,2441.46
FLASH_CS: P3.43 U1.75 U2.1 | length 4202.5
  Top Layer w4: v1@3042.46,3819.54 ccw(c3033.93,3828.07) 3046,3828.07 ccw(c3058.07,3828.07) v1@3049.54,3819.54 ; v1(3046,3816) 3046,4752 3069,4775 U2.1@3205,4775 ; U2.1@3177.58,4767.58 ccw(c3159.65,4749.65) 3159.65,4775 ccw(c3159.65,4800.35) U2.1@3177.58,4782.42 ; U2.1@3180.4,4770.4 ccw(c3169.31,4759.31) 3169.31,4775 ccw(c3169.31,4790.69) U2.1@3180.4,4779.6 ; v1@5047.01,3689.83 cw(c5049.55,3682.57) 5054.99,3688.01 ; v1(5048,3687) 5056,3687 ; v1@5048.33,3686.06 cw(c5051.88,3675.89) 5059.5,3683.5 ; v1@5049.65,3682.28 cw(c5054.21,3669.21) 5064,3679 ; v1@5052.49,3684.81 cw(c5056,3683.1) 5056,3687 ; v1@5052.49,3689.19 ccw(c5056,3690.9) 5056,3687 ; v1@5058.46,3478.54 ccw(c5045.1,3491.9) 5064,3491.9 ; v1@5061.29,3475.71 ccw(c5054.76,3482.24) 5064,3482.24 ccw(c5069.24,3482.24) v1@5065.54,3478.54 ; v1@5064,3475 5064,3679 ; U1.75@5103.76,3474.92 ccw(c5100.27,3478.41) U1.75@5105.2,3478.41 ; U1.75@5105.2,3473.48 5105.2,3495.47 ; 5105.2,3479.39 ccw(c5111.53,3479.39) U1.75@5107.06,3474.92 ; 5111.7,3501.97 ccw(c5096.47,3517.2) v1@5118,3517.96 ; v1@5114,3517.82 cw(c5083.91,3516.76) 5105.2,3495.47 ; v1@5116.47,3513.69 cw(c5113.87,3509.27) 5119,3509.27 ; 5118.21,3508.47 ccw(c5109.03,3517.65) v1@5122,3518.11 ; v1(5119,3518) 5119,3509.27 ; v1@5121.53,3513.69 ccw(c5124.13,3509.27) 5119,3509.27 ; 5056,3687 5064,3679 ; 5105.2,3495.47 5119,3509.27
  Bottom Layer w4: v1(3046,3816) 3377,3816 3433,3872 3570,3872 ; v1@3049.54,3812.46 cw(c3058.07,3803.93) 3058.07,3816 cw(c3058.07,3828.07) v1@3049.54,3819.54 ; P3.43@3699.88,3897.63 ccw(c3680,3887.84) 3680,3910 ; P3.43@3699.88,3922.37 cw(c3680,3932.16) 3680,3910 ; P3.43@3703.47,3899.4 ccw(c3686.43,3891.01) 3686.43,3910 ccw(c3686.43,3928.99) P3.43@3703.47,3920.6 ; P3.43@3707.06,3901.16 ccw(c3692.86,3894.17) 3692.86,3910 ccw(c3692.86,3925.83) P3.43@3707.06,3918.84 ; P3.43@3725,3910 3680,3910 ; v1@5043,3687.13 ccw(c5030.93,3687.45) 5039.69,3695.76 ccw(c5048.45,3704.07) v1@5048.13,3692 ; v1(5048,3687) 4993,3745 4976,3762 3592,3762 3562,3792 3562,3864 3570,3872 ; v1(5062,3475) 5062,3470 5071,3470 v1(5119,3518) ; v1@5114,3518 cw(c5101.93,3518) 5110.46,3509.46 cw(c5119,3500.93) v1@5119,3513 ; 3570,3872 3642,3872 3680,3910
FSMC_NBL0: P2.2 U1.141 U？1.39 | length 4744.3
  Top Layer w4: v1(5050,2346.63) U1.141@5105.13,2401.76 5119,2415.63 5119,2501.61 5094,2526.61 v1(5094,3237) ; v1@5050,2351.63 ccw(c5050,2363.7) 5058.54,2355.17 ccw(c5067.07,2346.63) v1@5055,2346.63 ; U1.141@5089.16,2388.12 cw(c5083.53,2388.12) 5087.51,2384.14 cw(c5091.49,2380.16) U1.141@5091.49,2385.79 ; v1@5090.46,3233.46 cw(c5081.93,3224.93) 5094,3224.93 cw(c5106.07,3224.93) v1@5097.54,3233.46 ; U1.141@5117.12,2417.05 ccw(c5112.58,2421.58) 5119,2421.58 ; U1.141@5119,2420.47 ccw(c5123.84,2420.47) U1.141@5120.42,2417.05 ; v1(5467,4190) 5472,4185 ; v1@5467.71,4190.71 ccw(c5481.49,4204.49) U？1.39@5481.49,4185 ; v1@5469.15,4185.49 cw(c5470.23,4183.23) 5472,4185 ; v1@5470.54,4193.54 ccw(c5491.14,4214.14) U？1.39@5491.14,4185 ; v1@5471.51,4187.85 ccw(c5473.77,4186.77) 5472,4185 ; U？1.39@5482.88,4182.88 ccw(c5477.76,4177.76) 5477.76,4185 ccw(c5477.76,4192.24) U？1.39@5482.88,4187.12 ; U？1.39@5510,4185 5472,4185 ; P2.2@6524.67,1841.57 cw(c6491.59,1791.02) v1@6552,1791.02 ; P2.2@6526.86,1844.92 cw(c6496.43,1798.42) v1@6552,1798.42 ; P2.2@6529.05,1848.26 cw(c6501.27,1805.82) 6552,1805.82 ; P2.2@6531.24,1851.61 cw(c6506.11,1813.22) 6552,1813.22 ; P2.2@6533.43,1854.96 cw(c6510.96,1820.61) 6552,1820.61 ; P2.2@6535.62,1858.31 cw(c6515.8,1828.01) 6552,1828.01 ; P2.2@6537.81,1861.65 cw(c6520.64,1835.41) 6552,1835.41 ; P2.2@6540,1865 6552,1865 v1(6552,1792) ; v1@6547.93,1794.9 ccw(c6538.55,1801.59) 6549.91,1803.49 ; v1@6548.09,1795.11 ccw(c6536.7,1804.17) 6551.16,1805.82 ; v1@6548.46,1795.54 ccw(c6539.93,1804.07) 6552,1804.07 ccw(c6564.07,1804.07) v1@6555.54,1795.54 ; 6549.78,1804.26 ccw(c6562.23,1806.35) v1@6554.9,1796.07 ; 6551.55,1802.33 ccw(c6561.08,1803.42) v1@6555.11,1795.91 ; 6552,1826.37 cw(c6578.63,1826.37) P2.2@6559.8,1845.2 ; 6552,1836.03 cw(c6568.97,1836.03) P2.2@6556.97,1848.03
  Bottom Layer w4: v1@5050,2341.63 cw(c5050,2329.56) 5058.54,2338.09 cw(c5067.07,2346.63) v1@5055,2346.63 ; v1(5050,2346.63) 5604.63,1792 v1(6552,1792) ; v1@5089,3237 ccw(c5076.93,3237) 5085.46,3245.54 ccw(c5094,3254.07) v1@5094,3242 ; v1(5094,3237) 5014,3317 5014,3464 5023,3473 5044,3473 5047,3476 5047,3481.21 5098.79,3533 5129,3533 5134,3528 5134,3510.71 5152,3492.71 5157.77,3492.71 5215.01,3549.95 5285.85,3549.95 5437,3701.1 5437,3977 5452,3992 5452,4026 5442,4036 5442,4158 5467,4183 v1(5467,4190) ; 5453.51,4169.51 ccw(c5433.03,4190) v1@5462,4190 ; 5460.34,4176.34 ccw(c5446.69,4190) v1@5466,4190 ; v1@6548.46,1788.46 ccw(c6539.93,1779.93) 6539.93,1792 ccw(c6539.93,1804.07) v1@6548.46,1795.54
FSMC_NBL1: P2.1 U1.142 U？1.40 | length 5486.9
  Top Layer w4: v1@5105.46,3215.46 cw(c5096.93,3206.93) 5109,3206.93 cw(c5121.07,3206.93) v1@5112.54,3215.46 ; v1(5109,3219) 5109,2538 5136,2511 5136,2404.79 ; U1.142@5119.05,2387.84 5136,2404.79 ; U1.142@5131.04,2403.13 ccw(c5119.07,2415.1) 5136,2415.1 ; U1.142@5133.01,2403.79 ccw(c5133.5,2407.29) 5136,2404.79 ; U1.142@5133.87,2400.3 ccw(c5128.73,2405.44) 5136,2405.44 ; U1.142@5135,2401.8 cw(c5138.5,2402.29) 5136,2404.79 ; U？1.40@5510,4215 5547,4215 ; U？1.40@5526.44,4215 cw(c5526.44,4182.44) v1@5549.46,4205.46 ; U？1.40@5536.1,4215 cw(c5536.1,4192.1) v1@5552.29,4208.29 ; U？1.40@5537.12,4212.88 cw(c5542.24,4207.76) 5542.24,4215 cw(c5542.24,4222.24) U？1.40@5537.12,4217.12 ; 5545.76,4215 cw(c5545.76,4201.76) v1@5555.12,4211.12 ; v1@5548.19,4210.38 ccw(c5543.68,4211.68) 5547,4215 ; v1@5549.46,4275.46 cw(c5540.93,4266.93) 5553,4266.93 cw(c5565.07,4266.93) v1@5556.54,4275.46 ; v1@5551.62,4213.81 cw(c5550.32,4218.32) 5547,4215 ; v1(5553,4209) 5547,4215 ; v1(5553,4279) 5553,4224 5547,4215 ; P2.1@6640,1865 6688,1913 6688,3405 v1(6678,3415) ; v1@6678,3410 cw(c6678,3397.93) 6686.54,3406.46 cw(c6695.07,3415) v1@6683,3415
  Bottom Layer w4: v1@5105.46,3222.54 ccw(c5096.93,3231.07) 5109,3231.07 ccw(c5121.07,3231.07) v1@5112.54,3222.54 ; v1(5109,3219) 5109,3364 5158,3413 5238.09,3413 5452.47,3627.37 5464.06,3627.37 5565,3728.31 5565,4197 v1(5553,4209) ; v1@5553,4204 cw(c5553,4191.93) 5561.54,4200.46 cw(c5570.07,4209) v1@5558,4209 ; v1@5553,4274 cw(c5553,4261.93) 5561.54,4270.46 cw(c5570.07,4279) v1@5558,4279 ; v1(5553,4279) 6395.64,3436.36 6505,3436.36 6518.36,3423 6670,3423 ; v1@6673.01,3415.23 ccw(c6662.72,3415.72) 6670,3423 ; v1@6677.77,3419.99 cw(c6677.28,3430.28) 6670,3423 ; v1(6678,3415) 6670,3423
FSMC_NE3: P3.13 R17.1 U1.125 U？1.6 | length 5188.7
  Top Layer w4: P3.13@3697.43,2414.88 ccw(c3660.44,2421.43) 3687,2448 ; P3.13@3701.37,2414.19 ccw(c3669.66,2419.8) 3692.43,2442.57 ccw(c3715.2,2465.34) P3.13@3720.81,2433.63 ; P3.13@3705.31,2413.49 ccw(c3678.88,2418.17) 3697.86,2437.14 ccw(c3716.83,2456.12) P3.13@3721.51,2429.69 ; P3.13@3709.25,2412.79 ccw(c3688.11,2416.53) 3703.29,2431.71 ccw(c3718.47,2446.89) P3.13@3722.21,2425.75 ; P3.13@3720.12,2437.57 cw(c3713.57,2474.56) 3687,2448 ; P3.13@3736.31,2398.69 cw(c3763.63,2371.37) 3763.63,2410 cw(c3763.63,2448.63) P3.13@3736.31,2421.31 ; P3.13@3739.14,2395.86 cw(c3773.28,2361.72) 3773.28,2410 cw(c3773.28,2458.28) P3.13@3739.14,2424.14 ; P3.13@3741.97,2393.03 cw(c3782.94,2352.06) 3782.94,2410 cw(c3782.94,2467.94) P3.13@3741.97,2426.97 ; P3.13@3744.8,2390.2 cw(c3792.6,2342.4) 3792.6,2410 cw(c3792.6,2477.6) P3.13@3744.8,2429.8 ; R17.1@4276.25,4200 ccw(c4243.06,4200) 4266.53,4223.47 ccw(c4290,4246.94) R17.1@4290,4213.75 ; R17.1@4280.25,4200 ccw(c4256.72,4200) 4273.36,4216.64 ccw(c4290,4233.28) R17.1@4290,4209.75 ; R17.1@4296.89,4193.11 cw(c4313.53,4176.47) 4313.53,4200 cw(c4313.53,4223.53) R17.1@4296.89,4206.89 ; R17.1@4299.72,4190.28 cw(c4323.19,4166.81) 4323.19,4200 cw(c4323.19,4233.19) R17.1@4299.72,4209.72 ; v1@4448.46,4196.46 ccw(c4439.93,4187.93) 4439.93,4200 ccw(c4439.93,4212.07) v1@4448.46,4203.54 ; v1(4452,4200) R17.1@4290,4200 4250,4240 3959,4240 3677,3958 3677,3365.61 3687,3355.61 3687,2993.96 3696,2984.96 3696,2939.68 3687,2930.68 3687,2448 ; U1.125@4866.45,2610.83 cw(c4860.82,2610.83) 4864.8,2606.85 cw(c4868.78,2602.87) U1.125@4868.78,2608.5 ; U1.125@4882.42,2624.47 4644.2,2386.25 4006.75,2386.25 3983,2410 P3.13@3725,2410 3687,2448 ; v1@5001,4195 cw(c5001,4182.93) 5009.54,4191.46 cw(c5018.07,4200) v1@5006,4200 ; v1(5001,4200) 5016,4185 U？1.6@5050,4185 ; U？1.6@5022.88,4182.88 ccw(c5017.76,4177.76) 5017.76,4185 ccw(c5017.76,4192.24) U？1.6@5022.88,4187.12
  Bottom Layer w4: v1(4452,4200) v1(5001,4200) ; v1@4455.54,4196.46 cw(c4464.07,4187.93) 4464.07,4200 cw(c4464.07,4212.07) v1@4455.54,4203.54 ; v1@4997.46,4196.46 ccw(c4988.93,4187.93) 4988.93,4200 ccw(c4988.93,4212.07) v1@4997.46,4203.54
FSMC_NE4: P1.1 P3.11 U1.127 | length 5035.3
  Top Layer w4: 3667,3011.69 cw(c3689.31,3011.69) v1@3673.54,3027.46 ; 3667,3021.34 cw(c3679.66,3021.34) v1@3670.71,3030.29 ; 3667,3040.66 ccw(c3679.66,3040.66) v1@3670.71,3031.71 ; 3667,3050.31 ccw(c3689.31,3050.31) v1@3673.54,3034.54 ; v1(3670,3031) v1@3667,3034 ; P3.11@3697,2310 ccw(c3629.4,2310) 3677.2,2357.8 ccw(c3725,2405.6) P3.11@3725,2338 ; P3.11@3701,2310 ccw(c3643.06,2310) 3684.03,2350.97 ccw(c3725,2391.94) P3.11@3725,2334 ; P3.11@3705,2310 ccw(c3656.72,2310) 3690.86,2344.14 ccw(c3725,2378.28) P3.11@3725,2330 ; P3.11@3709,2310 ccw(c3670.37,2310) 3697.69,2337.31 ccw(c3725,2364.63) P3.11@3725,2326 ; P3.11@3725,2310 3677,2358 3677,2939.35 3678.32,2940.68 3678.32,2973.63 3667,2984.96 v1@3667,3034 ; P1.1@4292,4630 cw(c4224.4,4630) 4272.2,4582.2 cw(c4320,4534.4) P1.1@4320,4602 ; P1.1@4296,4630 cw(c4238.06,4630) 4279.03,4589.03 cw(c4320,4548.06) P1.1@4320,4606 ; P1.1@4300,4630 cw(c4251.72,4630) 4285.86,4595.86 cw(c4320,4561.72) P1.1@4320,4610 ; P1.1@4304,4630 cw(c4265.37,4630) 4292.69,4602.69 cw(c4320,4575.37) P1.1@4320,4614 ; P1.1@4320,4630 3667,3977 v1@3667,3034 ; v1(4798.75,2971.4) 4836.6,2971.4 4926,2882 4926,2612.37 U1.127@4910.26,2596.63 ; U1.127@4922.25,2611.92 ccw(c4913.19,2620.97) 4926,2620.97
  Bottom Layer w4: v1(3670,3031) 3687,3048 4758.75,3048 4798.75,3008 v1(4798.75,2971.4) ; v1@3670,3036 ccw(c3670,3048.07) 3678.54,3039.54 ccw(c3687.07,3031) v1@3675,3031 ; v1@4795.21,2974.94 ccw(c4786.68,2983.48) 4798.75,2983.48 ccw(c4810.82,2983.48) v1@4802.29,2974.94
FSMC_NOE: P3.18 U1.118 U？1.41 | length 5260.6
  Top Layer w4: v1@3583.46,3843.46 cw(c3574.93,3834.93) 3587,3834.93 cw(c3599.07,3834.93) v1@3590.54,3843.46 ; v1(3587,3847) 3587,2928 ; P3.18@3597.43,2614.88 ccw(c3560.44,2621.43) 3587,2648 ; P3.18@3601.37,2614.19 ccw(c3569.66,2619.8) 3592.43,2642.57 ccw(c3615.2,2665.34) P3.18@3620.81,2633.63 ; P3.18@3605.31,2613.49 ccw(c3578.88,2618.17) 3597.86,2637.14 ccw(c3616.83,2656.12) P3.18@3621.51,2629.69 ; P3.18@3609.25,2612.79 ccw(c3588.11,2616.53) 3603.29,2631.71 ccw(c3618.47,2646.89) P3.18@3622.21,2625.75 ; P3.18@3620.12,2637.57 cw(c3613.57,2674.56) 3587,2648 ; P3.18@3625,2610 3587,2648 ; v1@3640.14,2967.14 ccw(c3631.6,2958.6) 3631.6,2970.68 ccw(c3631.6,2982.75) v1@3640.14,2974.21 ; v1(3643.68,2970.68) 3629.68,2970.68 3587,2928 ; 4721.08,2988.13 ccw(c4709.21,3000) v1@4726,3000 ; 4725.8,2992.85 cw(c4731,2987.65) v1@4731,2995 ; v1(4731,3000) 4731,2998.04 4718,2985.04 4718,2920 4799,2839 4799,2735.92 U1.118@4784.98,2721.9 ; U1.118@4796.97,2737.19 ccw(c4792.09,2742.08) 4799,2742.08 ; U1.118@4799,2740.26 ccw(c4803.34,2740.26) U1.118@4800.27,2737.19 ; v1(5461,4245) U？1.41@5510,4245 ; v1@5464.54,4241.46 cw(c5473.07,4232.93) 5473.07,4245 cw(c5473.07,4257.07) v1@5464.54,4248.54 ; U？1.41@5482.88,4242.88 ccw(c5477.76,4237.76) 5477.76,4245 ccw(c5477.76,4252.24) U？1.41@5482.88,4247.12 ; 3587,2648 3587,2928
  Bottom Layer w4: v1(3587,3847) 3592,3852 3683,3852 3686,3855 4283,3855 4594,4166 5382,4166 v1(5461,4245) ; v1@3587.71,3846.29 cw(c3601.49,3832.51) 3601.49,3852 ; v1@3590.54,3843.46 cw(c3611.14,3822.86) 3611.14,3852 ; v1(3643.68,2970.68) 3648,2970.68 3655.68,2978.35 ; v1@3643.94,2971.64 ccw(c3645.79,2978.47) 3650.79,2973.47 ; v1@3644.98,2975.5 ccw(c3647.87,2986.16) 3655.68,2978.35 ; v1@4727.46,2996.46 ccw(c4718.93,2987.93) 4718.93,3000 ccw(c4718.93,3012.07) v1@4727.46,3003.54 ; v1(4731,3000) 3772,3000 3743.98,2971.98 3676.7,2971.98 3670.32,2978.35 3655.68,2978.35 ; v1@5456,4245 cw(c5443.93,4245) 5452.46,4236.46 cw(c5461,4227.93) v1@5461,4240
FSMC_NWE: P1.3 P3.17 U1.119 U？1.17 | length 5870.3
  Top Layer w4: P3.17@3725,2610 3773,2658 3773,3830 v1(3763,3840) ; P3.17@3725,2626 ccw(c3725,2664.63) 3752.31,2637.31 ccw(c3779.63,2610) P3.17@3741,2610 ; P3.17@3725,2630 ccw(c3725,2678.28) 3759.14,2644.14 ccw(c3793.28,2610) P3.17@3745,2610 ; P3.17@3725,2634 ccw(c3725,2691.94) 3765.97,2650.97 ccw(c3806.94,2610) P3.17@3749,2610 ; P3.17@3725,2638 ccw(c3725,2705.6) 3772.8,2657.8 ccw(c3820.6,2610) P3.17@3753,2610 ; v1@3763,3835 cw(c3763,3822.93) 3771.54,3831.46 cw(c3780.07,3840) v1@3768,3840 ; 3773,2895.62 cw(c3812.38,2895.62) 3784.54,2923.46 ccw(c3793.07,2914.93) 3781,2914.93 ccw(c3768.93,2914.93) v1@3777.46,2923.46 ; 3773,2905.27 cw(c3802.73,2905.27) v1@3781.71,2926.29 ; 3773,2914.93 cw(c3793.07,2914.93) v1@3778.88,2929.12 ; 3773,2924.59 cw(c3783.41,2924.59) 3776.05,2931.95 ; 3773,2929.41 ccw(c3783.41,2929.41) 3776.05,2922.05 ; 3773,2939.07 ccw(c3793.07,2939.07) v1@3778.88,2924.88 ; 3773,2948.73 ccw(c3802.73,2948.73) v1@3781.71,2927.71 ; 3773,2958.38 ccw(c3812.38,2958.38) v1@3784.54,2930.54 ; P1.3@4420,4602 cw(c4420,4534.4) 4467.8,4582.2 cw(c4515.6,4630) P1.3@4448,4630 ; P1.3@4420,4606 cw(c4420,4548.06) 4460.97,4589.03 cw(c4501.94,4630) P1.3@4444,4630 ; P1.3@4420,4610 cw(c4420,4561.72) 4454.14,4595.86 cw(c4488.28,4630) P1.3@4440,4630 ; P1.3@4420,4614 cw(c4420,4575.37) 4447.31,4602.69 cw(c4474.63,4630) P1.3@4436,4630 ; P1.3@4420,4630 4480,4570 4480,4163 v1(4620,4023) ; v1@4615,4023 ccw(c4602.93,4023) 4611.46,4031.54 ccw(c4620,4040.07) v1@4620,4028 ; v1@4733,2922 cw(c4733,2909.93) 4741.54,2918.46 cw(c4750.07,2927) v1@4738,2927 ; v1(4733,2927) 4814.68,2845.32 4814.68,2723.76 U1.119@4798.9,2707.98 ; U1.119@4810.9,2723.27 ccw(c4801.76,2732.41) 4814.68,2732.41 ; v1@4905,3866 cw(c4905,3853.93) 4913.54,3862.46 cw(c4922.07,3871) v1@4910,3871 ; v1(4905,3871) 4921,3855 U？1.17@5050,3855 ; U？1.17@5022.88,3852.88 ccw(c5017.76,3847.76) 5017.76,3855 ccw(c5017.76,3862.24) U？1.17@5022.88,3857.12
  Bottom Layer w4: v1(3763,3840) 4874,3840 v1(4905,3871) 4753,4023 v1(4620,4023) ; v1@3766.54,3836.46 cw(c3775.07,3827.93) 3775.07,3840 cw(c3775.07,3852.07) v1@3766.54,3843.54 ; v1(3781,2927) 4030.42,2927 4038.42,2919 4060.42,2919 4065.29,2923.87 4466.04,2923.87 4469.17,2927 v1(4733,2927) ; v1@3784.54,2923.46 cw(c3793.07,2914.93) 3793.07,2927 cw(c3793.07,2939.07) v1@3784.54,2930.54 ; v1@4623.54,4019.46 cw(c4632.07,4010.93) 4632.07,4023 cw(c4632.07,4035.07) v1@4623.54,4026.54 ; v1@4729.46,2923.46 ccw(c4720.93,2914.93) 4720.93,2927 ccw(c4720.93,2939.07) v1@4729.46,2930.54 ; v1@4905,3866 ccw(c4905,3853.93) 4896.46,3862.46 ccw(c4887.93,3871) 4900,3871 ccw(c4887.93,3871) 4896.46,3879.54 ccw(c4905,3888.07) v1@4905,3876
FSMCNOE: P1.4